# EAGLE board NSL_TinyAnnoy (EAGLE 5.11)
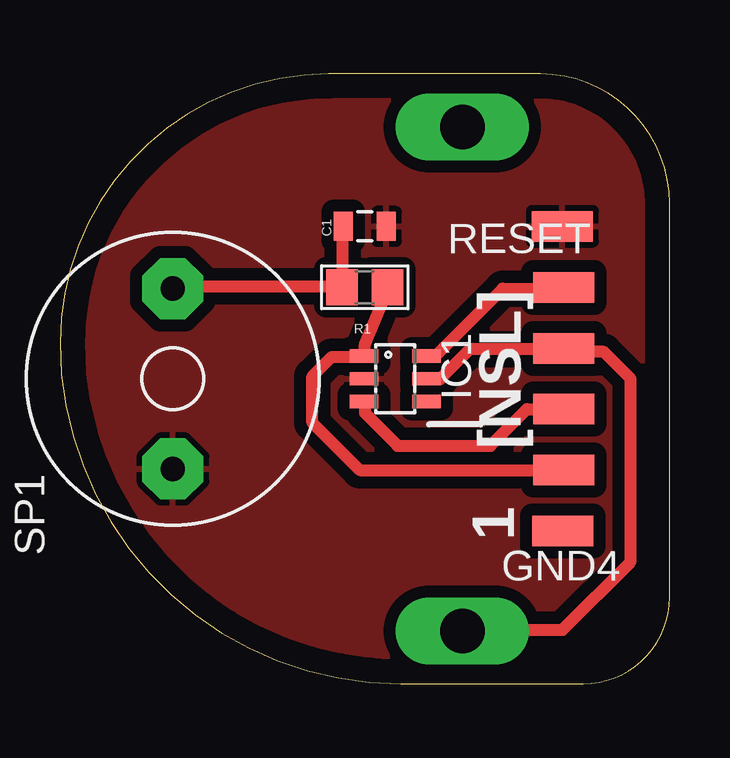
[diagram p0: board, top side]
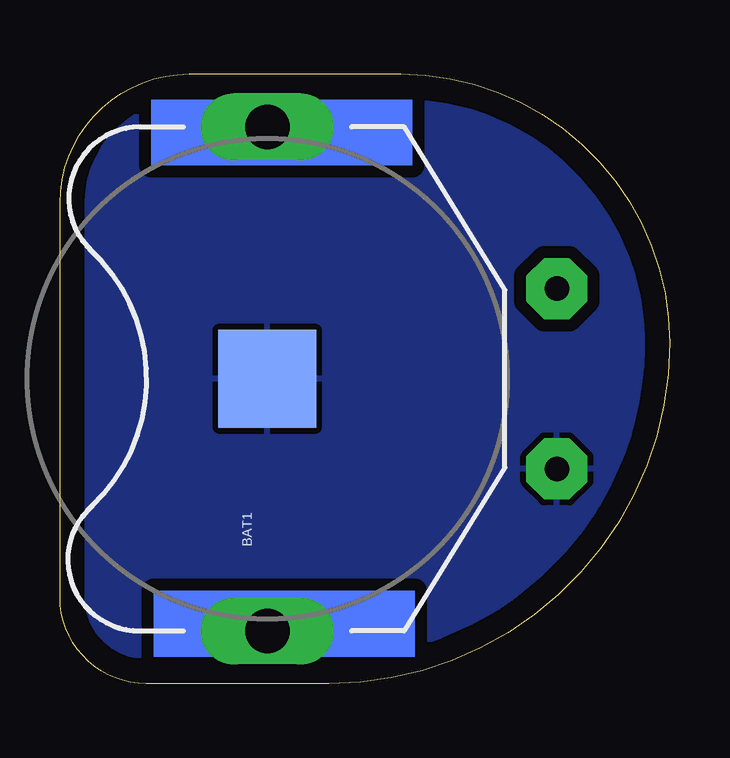
[diagram p1: board, bottom side, seen from below]

Size 25.4 x 25.4 mm. Coordinates in mm from the lower left corner, seen from the top.
Outline: 11.2,25.4 arc90 0,14.2 arc90 14.2,0 21.81,0 arc90 25.4,3.59 25.4,20.01 arc90 20.01,25.4 11.2,25.4
Copper layers (1*16): Top 0.035mm / dielectric 1.5mm / Bottom 0.035mm
Design rules "default": minimum track width 10mil, minimum drill 24mil, track to track 8mil, track to pad 8mil, pad to pad 8mil, via to via 8mil, smd to smd 8mil, copper to edge 40mil, drill to drill 8mil, minimum pad ring 10mil, minimum via ring 8mil, stop-mask expansion 4mil, vias tented up to drill 0mil, thermal gap 10mil
Net classes: 0 default: width 0.508 mm
Milling: 7 lines

## Footprints (pad centres in the part's own frame; a part is rotated, then mirrored left to right if it is on the bottom)
BATTERY_20MM_PTH_COMPACT = drill 1.854 long: 1 -10.5,0; 3 10.5,0 | smd 4.064 x 4.064: 2 0,0
0805 = smd 0.8 x 1.2: 1 -0.9,0; 2 0.9,0
WIREPAD_SMD1,27-2,54 = smd 1.27 x 2.54: 1 0,0
SOT23-6 = smd 0.55 x 1.2: 1 -0.95,-1.3; 2 0,-1.3; 3 0.95,-1.3; 4 0.95,1.3; 5 0,1.3; 6 -0.95,1.3
0805' = smd 1.3 x 1.5: 1 -0.95,0; 2 0.95,0
AL60P = drill 1.016 pad 2.54 octagon: 1 -3.759,0; 2 3.759,0

## Placement (x,y rotation side)
BAT1  [BATTERY_20MM_PTH_COMPACT]  16.76,12.7 90 bottom
C1  [0805]  12.7,19.05 0 top
GND  [WIREPAD_SMD1,27-2,54]  20.93,19.05 270 top
GND4  [WIREPAD_SMD1,27-2,54]  20.95,6.35 90 top
IC1  ATTINY10  [SOT23-6]  13.97,12.7 270 top
PAD1  [WIREPAD_SMD1,27-2,54]  20.98,8.89 90 top
PAD2  [WIREPAD_SMD1,27-2,54]  20.98,11.43 90 top
R1  [0805']  12.7,16.51 180 top
RESET  [WIREPAD_SMD1,27-2,54]  20.98,16.51 270 top
SP1  SPEAKER/AL60P  [AL60P]  4.7,12.7 270 top
VCC  [WIREPAD_SMD1,27-2,54]  20.98,13.97 270 top

## Library data of the parts
BAT1 C1 = SparkFun
GND GND4 PAD1 PAD2 RESET VCC = Nullspace
IC1 SP1 = adafruit
R1 = microbuilder

## Nets
GND: BAT1.2 C1.2 GND.1 IC1.2 SP1.2
N$1: GND4.1
N$4: C1.1 R1.2 SP1.1
N$5: IC1.6 RESET.1
N$8: IC1.4
TPICLK: IC1.3 PAD2.1
TPIDATA: IC1.1 PAD1.1 R1.1
VCC: BAT1.1 IC1.5 VCC.1

## Tracks (layer width: path | path; a pad name or v marks a point on that pad's centre or on a via)
GND
  pour Top (isolate 0.508): -1.27,0 25.4,0 25.4,25.4 -1.27,25.4
  pour Bottom (isolate 0.508): -1.27,0 25.4,0 25.4,25.4 -1.27,25.4
N$4
  Top 0.508: C1.1 11.79,19.05 11.79,16.51 R1.2 11.53,16.56 4.83,16.56 4.72,16.46 SP1.1
N$5
  Top 0.508: RESET.1 20.93,16.46 18.44,16.46 15.65,13.67 15.29,13.67 IC1.6
TPICLK
  Top 0.508: PAD2.1 19.46,11.43 17.93,9.91 14.07,9.91 12.7,11.28 12.7,11.74 IC1.3
TPIDATA
  Top 0.508: R1.1 13.61,16.51 13.61,16.31 12.7,14.12 12.7,13.67 IC1.1 12.45,13.61 11.33,13.61 10.52,12.8 10.52,10.87 12.5,8.89 PAD1.1
VCC
  Top 0.508: IC1.5 15.29,12.7 15.85,12.7 17.07,13.92 20.93,13.92 VCC.1 21.18,13.82 22.66,13.82 23.77,12.7 23.77,5.08 20.93,2.23 16.76,2.23 BAT1.1
(copper drawn outside any net)
  shapes: Bottom area x2

## Text on the board
tPlace: [NSL] | 1